# Altium PCB tPad_Yeongmi.PcbDoc (part 1 of 2)
Units mm, origin at the board's own origin, x right, y up, seen from the top; angles counter-clockwise.
Board outline 153.92 x 137.16 mm, 2 copper layers (Top Layer, Bottom Layer); 136 components, 117 nets, 499 pads, 114 vias.
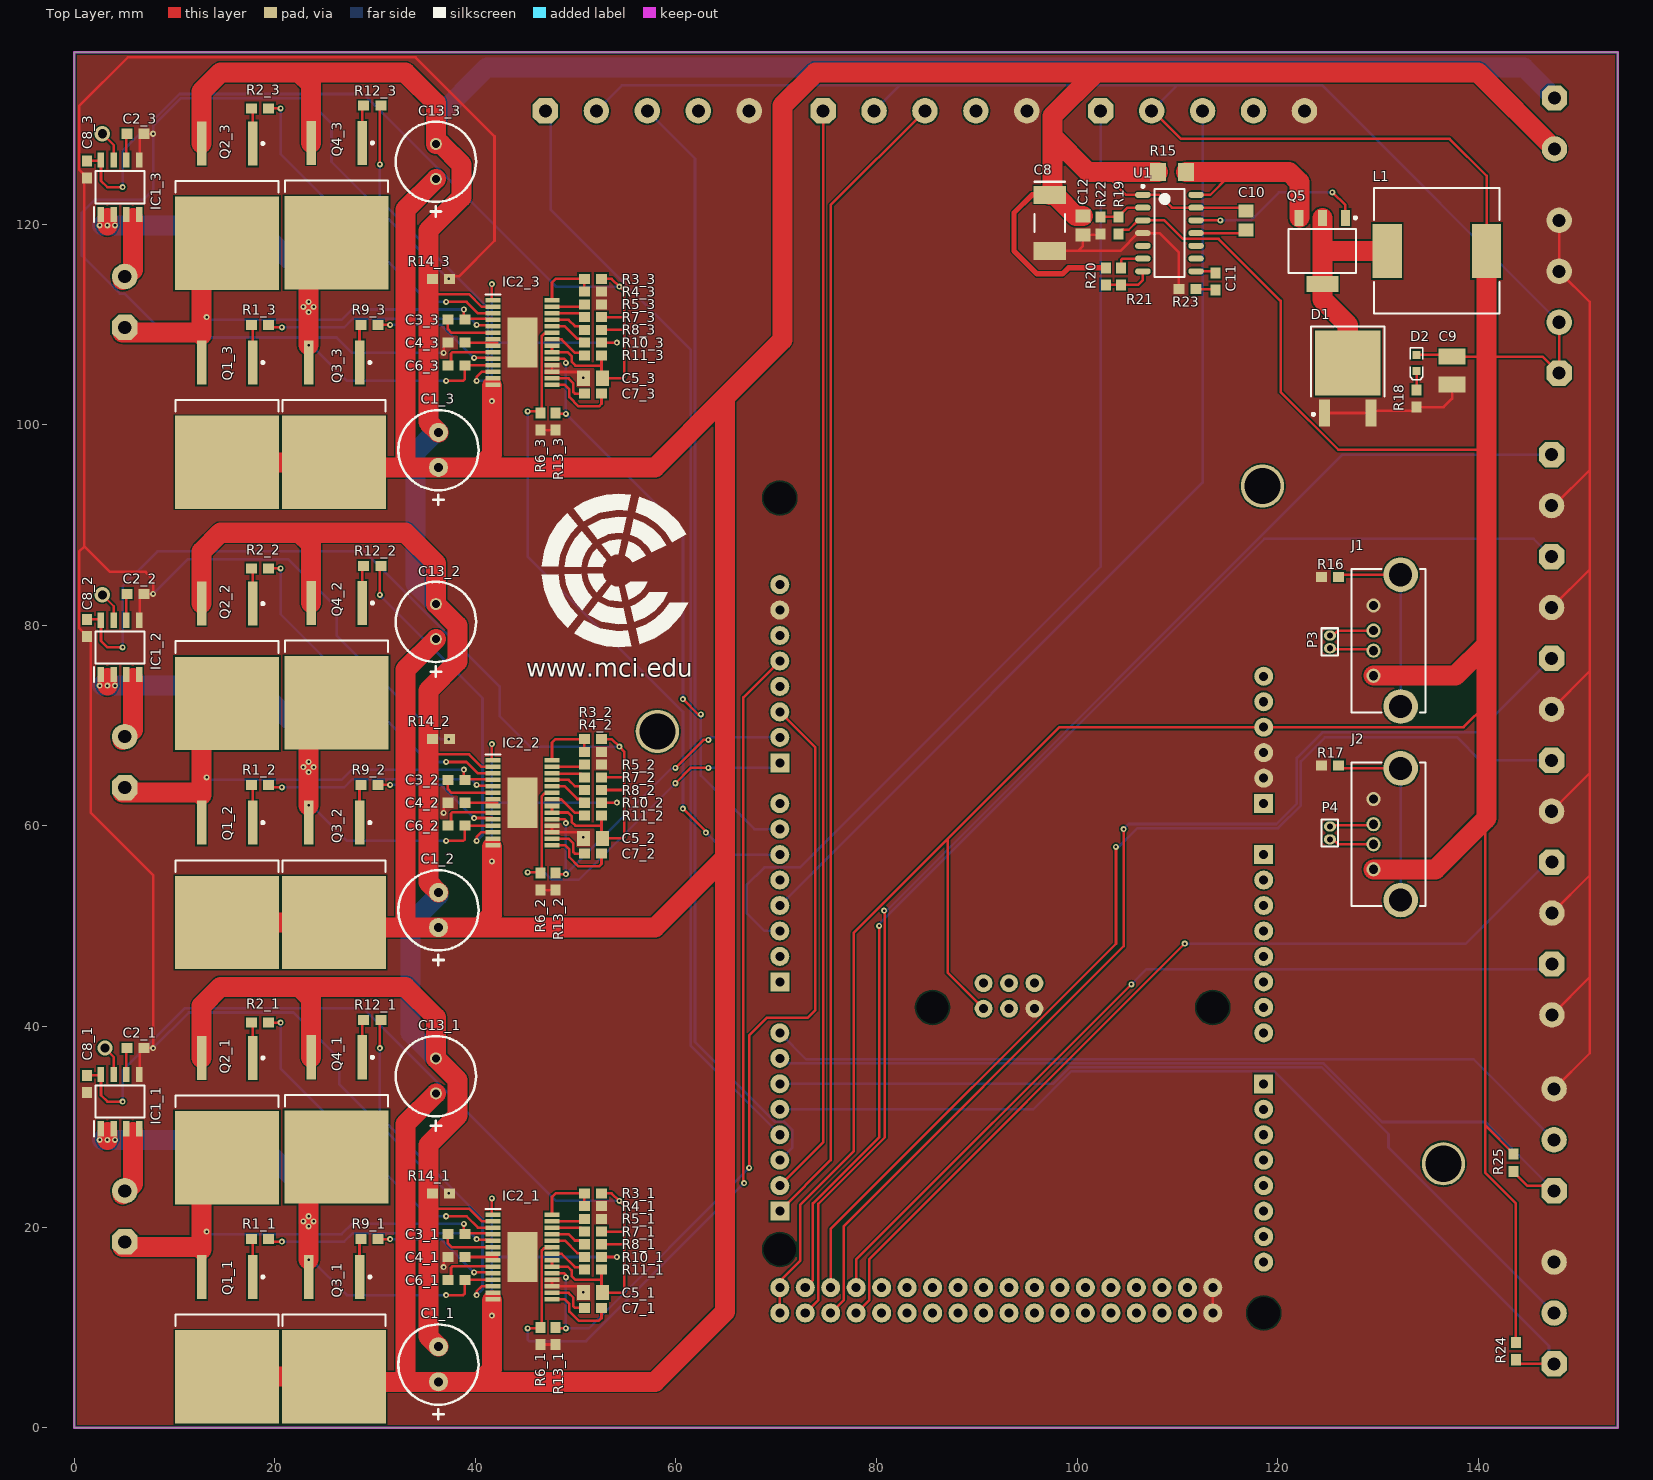
[diagram p0: Top Layer view]
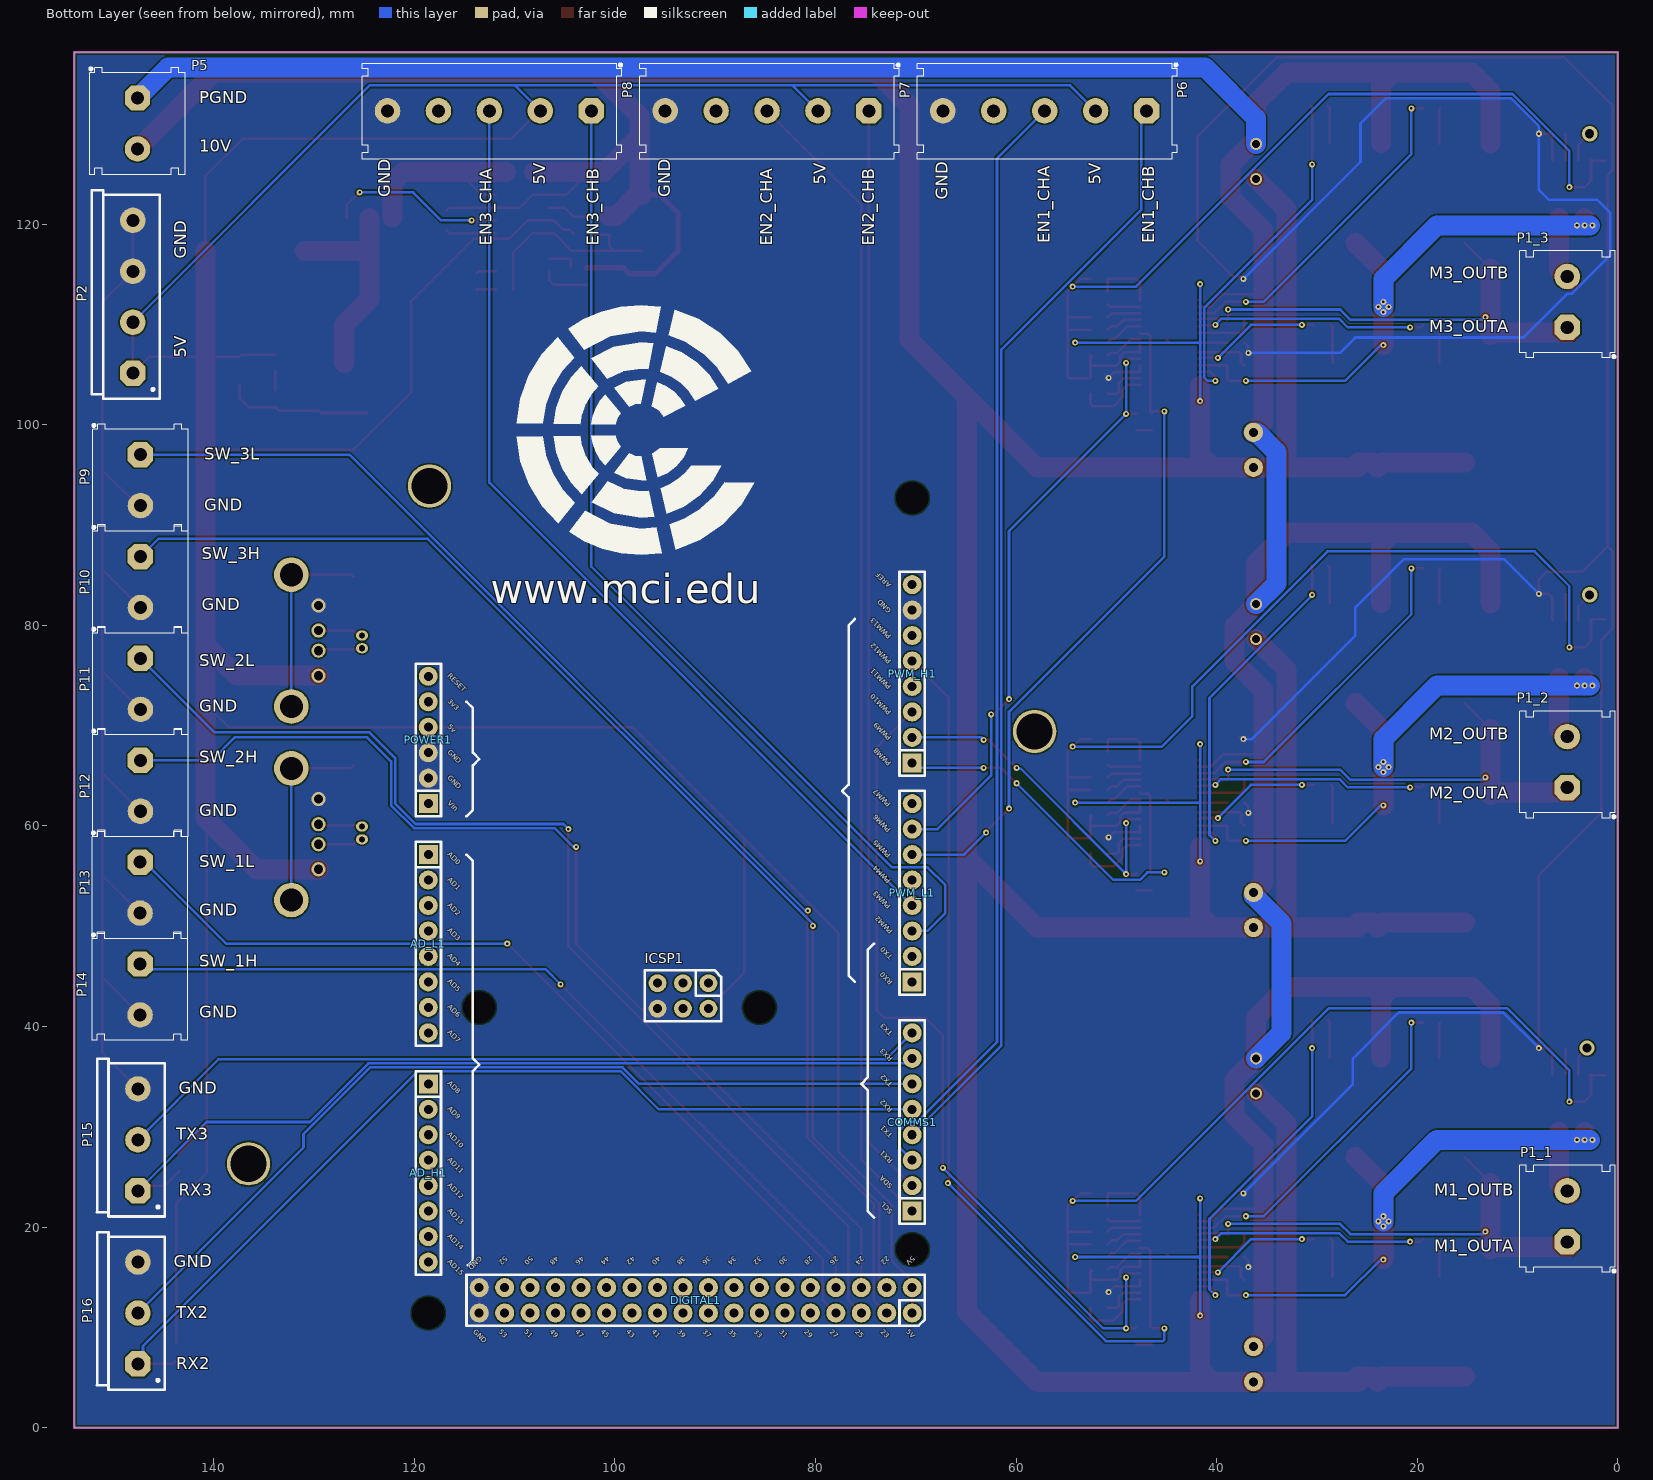
[diagram p1: Bottom Layer view, seen from below]
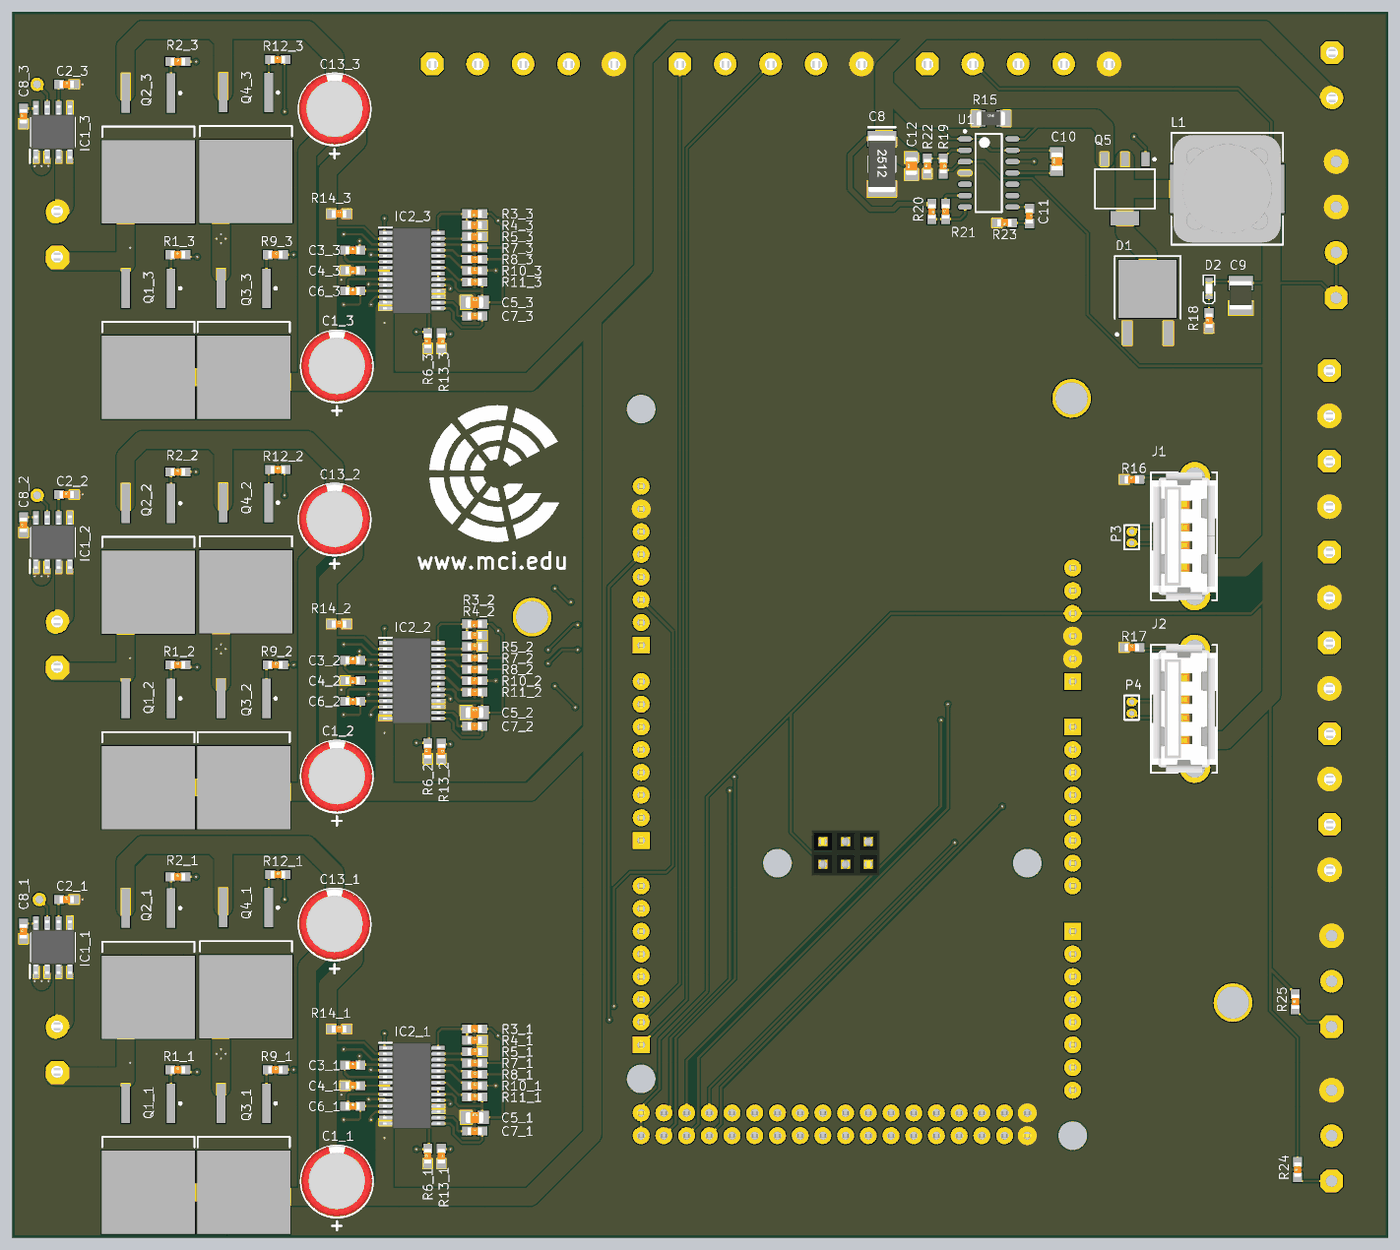
[diagram p3: 3D render of the assembled board from above, using the file's embedded part models]
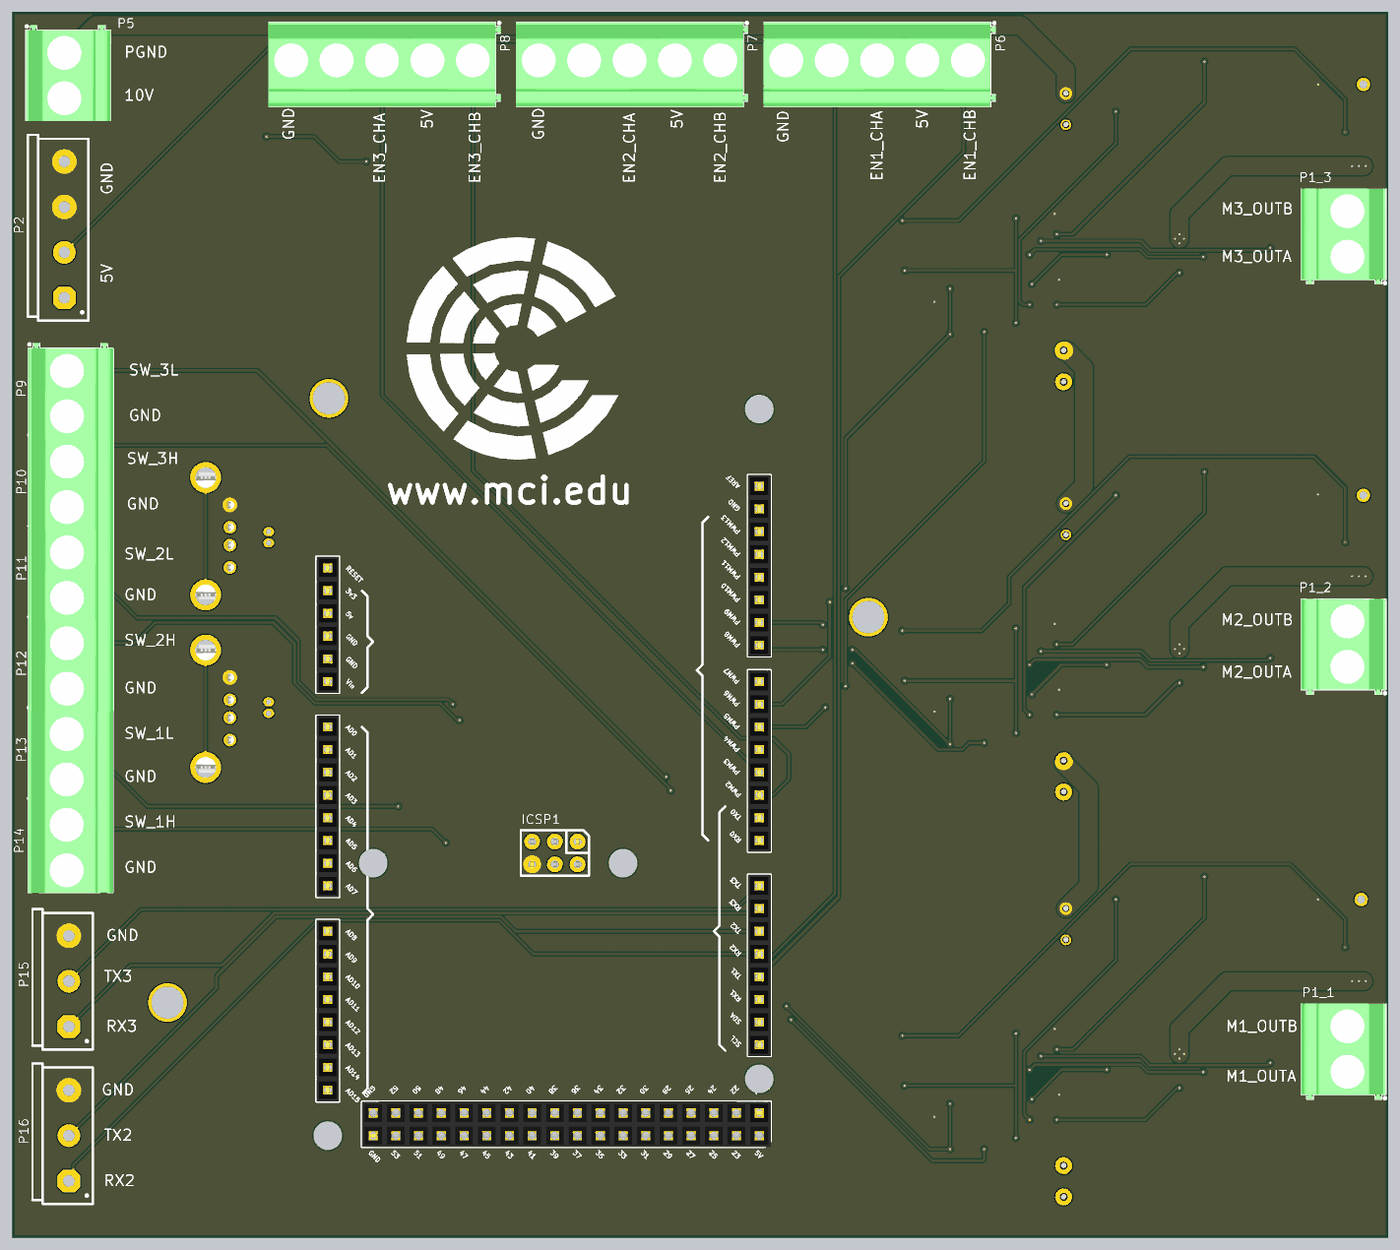
[diagram p4: 3D render of the assembled board from below, using the file's embedded part models]

## Layer stack, top to bottom
Top Solder: solder mask 0.0102, Solder Resist, Dk 3.5
Top Layer: signal copper 0.0356
Dielectric 1: dielectric 0.32, FR-4, Dk 4.8
Bottom Layer: signal copper 0.0356
Bottom Solder: solder mask 0.0102, Solder Resist, Dk 3.5

## Board outline
0,0 0,137.16 153.924,137.16 153.924,0

## Design rules (kind name [scope] priority, off if disabled: settings)
Clearance [All] p1: gap=0.152 ignorepadtopadclearanceinfootprint=FALSE
PolygonConnect [All] p1: connectstyle=Direct reliefconductorwidth=0.254 reliefentries=4 polygonreliefangle="90 Angle" airgapwidth=0.254
RoomDefinition Bridge_1 [InComponentClass('Bridge_1')] p1: confinementstyle=ConfineIn formatcopy=TRUE lockcomponents=FALSE outline -0.508,0 59.436,0 59.436,45.212 -0.508,45.212
RoomDefinition Bridge_2 [InComponentClass('Bridge_2')] p2: confinementstyle=ConfineIn formatcopy=TRUE lockcomponents=FALSE outline -0.508,45.3 59.436,45.3 59.436,91.186 -0.508,91.186
RoomDefinition Bridge_3 [InComponentClass('Bridge_3')] p3: confinementstyle=ConfineIn formatcopy=TRUE lockcomponents=FALSE outline -0.508,91.186 59.436,91.186 59.436,136.906 -0.508,136.906
RoomDefinition U_Arduino [InComponentClass('U_Arduino')] p4: confinementstyle=ConfineIn formatcopy=TRUE lockcomponents=FALSE outline 125.222,109.728 125.222,4.572 65.532,4.572 65.532,109.728
RoutingVias [All] p1: holewidth=0.25 width=0.6 viastyle="Through Hole" minholewidth=0.2 minwidth=0.25 maxholewidth=0.1 maxwidth=2
SolderMaskExpansion [All] p1: expansion=0.102
Width [All] p1: maxlimit=2 minlimit=0.254 preferedwidth=0.254
30 further rules are at their usual default settings.

## Classes and differential pairs
component class Overview: P6 P7 P8 P9 P10 P11 P12 P13 P14 P15 P16 R24 R25
component class U_Arduino: AD_H1 AD_L1 COMMS1 DIGITAL1 ICSP1 POWER1 PWM_H1 PWM_L1
channel class OutputStage: Bridge_1 Bridge_2 Bridge_3
component class PowerSupply: C8 C9 C10 C11 C12 D1 D2 J1 J2 L1 P2 P3 P4 P5 Q5 R15 R16 R17 R18 R19 R20 R21 R22 R23 U1
component class Bridge_1: C1_1 C2_1 C3_1 C4_1 C5_1 C6_1 C7_1 C8_1 C13_1 IC1_1 IC1_U_OutputStage3 IC2_1 IC2_U_OutputStage3 P1_1 Q1_1 Q1_U_OutputStage3 Q2_1 Q2_U_OutputStage3 Q3_1 Q3_U_OutputStage3 Q4_1 Q4_U_OutputStage3 R1_1 R2_1 R3_1 R4_1 R5_1 R6_1 R7_1 R8_1 R9_1 R10_1 R11_1 R12_1 R13_1 R14_1
component class Bridge_2: C1_2 C2_2 C3_2 C4_2 C5_2 C6_2 C7_2 C8_2 C13_2 IC1_2 IC1_U_OutputStage2 IC2_2 IC2_U_OutputStage2 P1_2 Q1_2 Q1_U_OutputStage2 Q2_2 Q2_U_OutputStage2 Q3_2 Q3_U_OutputStage2 Q4_2 Q4_U_OutputStage2 R1_2 R2_2 R3_2 R4_2 R5_2 R6_2 R7_2 R8_2 R9_2 R10_2 R11_2 R12_2 R13_2 R14_2
component class Bridge_3: C1_3 C2_3 C3_3 C4_3 C5_3 C6_3 C7_3 C8_3 C13_3 IC1_3 IC1_U_OutputStage1 IC2_3 IC2_U_OutputStage1 P1_3 q Q1_3 Q1_U_OutputStage1 Q2_3 Q2_U_OutputStage1 Q3_3 Q3_U_OutputStage1 Q4_3 Q4_U_OutputStage1 R1_3 R2_3 R3_3 R4_3 R5_3 R6_3 R7_3 R8_3 R9_3 R10_3 R11_3 R12_3 R13_3 R14_3

## Components (designator, comment, footprint, x,y, rotation, side; value= is the part's Value field where it differs from the comment)
AD_H1 "AD_H" "Header 8x1 8.5mm" 118.618,34.29 r270 bottom locked
AD_L1 "AD_L" "Header 8x1 8.5mm" 118.618,57.15 r270 bottom locked
C1_1 "100µF" Cap_THT_Elko_rad_D8mm#1 36.322,6.29 r90 top (schematic designator C1)
C1_2 "100µF" Cap_THT_Elko_rad_D8mm#1 36.322,51.59 r90 top (schematic designator C1)
C1_3 "100µF" Cap_THT_Elko_rad_D8mm#1 36.322,97.476 r90 top (schematic designator C1)
C2_1 "100nF" _0603 6.096,37.846 r0 top (schematic designator C2)
C2_2 "100nF" _0603 6.096,83.146 r0 top (schematic designator C2)
C2_3 "100nF" _0603 6.096,129.032 r0 top (schematic designator C2)
C3_1 "100nF" _0603 38.1,19.304 r0 top (schematic designator C3)
C3_2 "100nF" _0603 38.1,64.604 r0 top (schematic designator C3)
C3_3 "100nF" _0603 38.1,110.49 r0 top (schematic designator C3)
C4_1 "4,7µF" _0603 38.1,17.018 r180 top (schematic designator C4)
C4_2 "4,7µF" _0603 38.1,62.318 r180 top (schematic designator C4)
C4_3 "4,7µF" _0603 38.1,108.204 r180 top (schematic designator C4)
C5_1 "1µF" _0805 51.728,13.462 r0 top (schematic designator C5)
C5_2 "1µF" _0805 51.728,58.762 r0 top (schematic designator C5)
C5_3 "1µF" _0805 51.728,104.648 r0 top (schematic designator C5)
C6_1 "100nF" _0603 38.1,14.732 r0 top (schematic designator C6)
C6_2 "100nF" _0603 38.1,60.032 r0 top (schematic designator C6)
C6_3 "100nF" _0603 38.1,105.918 r0 top (schematic designator C6)
C7_1 "470nF" _0603 51.728,11.938 r0 top (schematic designator C7)
C7_2 "470nF" _0603 51.728,57.238 r0 top (schematic designator C7)
C7_3 "470nF" _0603 51.728,103.124 r0 top (schematic designator C7)
C8 "100µF/25V Tan" C 97.282,120.142 r270 top
C8_1 "100nF" _0603 1.27,34.29 r90 top (schematic designator C8)
C8_2 "100nF" _0603 1.27,79.756 r90 top (schematic designator C8)
C8_3 "100nF" _0603 1.27,125.476 r90 top (schematic designator C8)
C9 "100µF/16V" _1210 137.414,105.41 r90 top
C10 "220nF" _0805 116.84,120.396 r90 top
C11 "22nF" _0603 113.792,114.3 r270 top
C12 "220nF" _0805 100.584,119.888 r90 top
C13_1 "100µF" Cap_THT_Elko_rad_D8mm#2 36.068,35.048 r90 top (schematic designator C13)
C13_2 "100µF" Cap_THT_Elko_rad_D8mm#2 36.068,80.348 r90 top (schematic designator C13)
C13_3 "100µF" Cap_THT_Elko_rad_D8mm#2 36.068,126.234 r90 top (schematic designator C13)
COMMS1 "Communication" "Header 8x1 8.5mm" 70.358,21.59 r90 bottom locked
D1 "IDD03SG60C" TO_252 127,102.826 r90 top
D2 "blue" LED_0603 133.858,106.172 r270 top
DIGITAL1 "IO_36" "HEADER 36X 8MM" 70.358,11.43 r0 bottom locked
IC1_1 "ACS712ELCTR-20A-T" SOIC127P600X175-8N 4.572,32.512 r90 top (schematic designator IC1)
IC1_2 "ACS712ELCTR-20A-T" SOIC127P600X175-8N 4.572,77.812 r90 top (schematic designator IC1)
IC1_3 "ACS712ELCTR-20A-T" SOIC127P600X175-8N 4.572,123.698 r90 top (schematic designator IC1)
IC2_1 "A3941KLPTR" SOP65P640X120-29N 44.704,17.018 r0 top (schematic designator IC2)
IC2_2 "A3941KLPTR" SOP65P640X120-29N 44.704,62.318 r0 top (schematic designator IC2)
IC2_3 "A3941KLPTR" SOP65P640X120-29N 44.704,108.204 r0 top (schematic designator IC2)
ICSP1 "ICSP" ICSP 90.678,44.323 r270 bottom
J1 "614004185023" 614004185023 131.064,78.486 r90 top
J2 "614004185023" 614004185023 131.064,59.182 r90 top
L1 "IND_47u_3A8" WE_PD_XXL 135.89,117.348 r0 top
P1_1 "WRTBL_2P_508" WRTBL_2P_508 4.826,21.082 r90 bottom (schematic designator P1)
P1_2 "WRTBL_2P_508" WRTBL_2P_508 4.826,66.382 r90 bottom (schematic designator P1)
P1_3 "WRTBL_2P_508" WRTBL_2P_508 4.826,112.268 r90 bottom (schematic designator P1)
P2 "WRTBL_4P_508" WRTBL_4P_508 148.082,112.776 r90 bottom
P3 "Loetpad_2x_1_27" Loetpad_2x_1_27 125.222,78.994 r270 top
P4 "Loetpad_2x_1_27" Loetpad_2x_1_27 125.222,59.944 r270 top
P5 "WRTBL_2P_508" WRTBL_2P_508 147.828,130.048 r270 bottom
P6 "WRTBL_5P_508" WRTBL_5P_508 57.15,131.318 r0 bottom
P7 "WRTBL_5P_508" WRTBL_5P_508 84.836,131.318 r0 bottom
P8 "WRTBL_5P_508" WRTBL_5P_508 112.522,131.318 r0 bottom
P9 "WRTBL_2P_508" WRTBL_2P_508 147.532,94.479 r270 bottom
P10 "WRTBL_2P_508" WRTBL_2P_508 147.532,84.319 r270 bottom
P11 "WRTBL_2P_508" WRTBL_2P_508 147.532,74.159 r270 bottom
P12 "WRTBL_2P_508" WRTBL_2P_508 147.532,63.999 r270 bottom
P13 "WRTBL_2P_508" WRTBL_2P_508 147.574,53.848 r270 bottom
P14 "WRTBL_2P_508" WRTBL_2P_508 147.574,43.688 r270 bottom
P15 "WRTBL_3P_508" WRTBL_3P_508 147.574,28.702 r90 bottom
P16 "WRTBL_3P_508" WRTBL_3P_508 147.574,11.43 r90 bottom
POWER1 "POWER" "Header 6x1 8.5mm" 118.618,62.23 r90 bottom locked
PWM_H1 "PWM_H" "Header 8x1 8.5mm" 70.358,66.294 r90 bottom
PWM_L1 "PWM_L" "Header 8x1 8.5mm" 70.358,44.45 r90 bottom locked
Q1_1 "IPB034N06L3 G" INF-PG-TO-263-3-2_A_N 15.24,8.83 r270 top (schematic designator Q1)
Q1_2 "IPB034N06L3 G" INF-PG-TO-263-3-2_A_N 15.24,54.13 r270 top (schematic designator Q1)
Q1_3 "IPB034N06L3 G" INF-PG-TO-263-3-2_A_N 15.24,100.016 r270 top (schematic designator Q1)
Q2_1 "IPB034N06L3 G" INF-PG-TO-263-3-2_A_N 15.24,30.674 r270 top (schematic designator Q2)
Q2_2 "IPB034N06L3 G" INF-PG-TO-263-3-2_A_N 15.24,75.974 r270 top (schematic designator Q2)
Q2_3 "IPB034N06L3 G" INF-PG-TO-263-3-2_A_N 15.24,121.86 r270 top (schematic designator Q2)
Q3_1 "IPB034N06L3 G" INF-PG-TO-263-3-2_A_N 25.908,8.83 r270 top (schematic designator Q3)
Q3_2 "IPB034N06L3 G" INF-PG-TO-263-3-2_A_N 25.908,54.13 r270 top (schematic designator Q3)
Q3_3 "IPB034N06L3 G" INF-PG-TO-263-3-2_A_N 25.908,100.016 r270 top (schematic designator Q3)
Q4_1 "IPB034N06L3 G" INF-PG-TO-263-3-2_A_N 26.162,30.734 r270 top (schematic designator Q4)
Q4_2 "IPB034N06L3 G" INF-PG-TO-263-3-2_A_N 26.162,76.034 r270 top (schematic designator Q4)
Q4_3 "IPB034N06L3 G" INF-PG-TO-263-3-2_A_N 26.162,121.92 r270 top (schematic designator Q4)
Q5 "BSP613P" INF-PG-SOT223_SC-73_N 124.46,117.348 r270 top
R1_1 "47R5" _0603 18.542,18.796 r0 top (schematic designator R1)
R1_2 "47R5" _0603 18.542,64.096 r0 top (schematic designator R1)
R1_3 "47R5" _0603 18.542,109.982 r0 top (schematic designator R1)
R2_1 "47R5" _0603 18.542,40.386 r0 top (schematic designator R2)
R2_2 "47R5" _0603 18.542,85.686 r0 top (schematic designator R2)
R2_3 "47R5" _0603 18.542,131.572 r0 top (schematic designator R2)
R3_1 "47k" _0603 51.728,23.368 r180 top (schematic designator R3)
R3_2 "47k" _0603 51.728,68.668 r180 top (schematic designator R3)
R3_3 "47k" _0603 51.728,114.554 r180 top (schematic designator R3)
R4_1 "4k7" _0603 51.728,22.098 r0 top (schematic designator R4)
R4_2 "4k7" _0603 51.728,67.398 r0 top (schematic designator R4)
R4_3 "4k7" _0603 51.728,113.284 r0 top (schematic designator R4)
R5_1 "47k" _0603 51.728,20.828 r0 top (schematic designator R5)
R5_2 "47k" _0603 51.728,66.128 r0 top (schematic designator R5)
R5_3 "47k" _0603 51.728,112.014 r0 top (schematic designator R5)
R6_1 "47k" _0603 46.482,9.144 r90 top (schematic designator R6)
R6_2 "47k" _0603 46.482,54.444 r90 top (schematic designator R6)
R6_3 "47k" _0603 46.482,100.33 r90 top (schematic designator R6)
R7_1 "47k" _0603 51.728,19.558 r0 top (schematic designator R7)
R7_2 "47k" _0603 51.728,64.858 r0 top (schematic designator R7)
R7_3 "47k" _0603 51.728,110.744 r0 top (schematic designator R7)
R8_1 "47k" _0603 51.728,18.288 r0 top (schematic designator R8)
R8_2 "47k" _0603 51.728,63.588 r0 top (schematic designator R8)
R8_3 "47k" _0603 51.728,109.474 r0 top (schematic designator R8)
R9_1 "47R5" _0603 29.464,18.796 r0 top (schematic designator R9)
R9_2 "47R5" _0603 29.464,64.096 r0 top (schematic designator R9)
R9_3 "47R5" _0603 29.464,109.982 r0 top (schematic designator R9)
R10_1 "20k" _0603 51.728,17.018 r0 top (schematic designator R10)
R10_2 "20k" _0603 51.728,62.318 r0 top (schematic designator R10)
R10_3 "20k" _0603 51.728,108.204 r0 top (schematic designator R10)
R11_1 "47k" _0603 51.728,15.748 r0 top (schematic designator R11)
R11_2 "47k" _0603 51.728,61.048 r0 top (schematic designator R11)
R11_3 "47k" _0603 51.728,106.934 r0 top (schematic designator R11)
R12_1 "47R5" _0603 29.718,40.64 r0 top (schematic designator R12)
R12_2 "47R5" _0603 29.718,85.94 r0 top (schematic designator R12)
R12_3 "47R5" _0603 29.718,131.826 r0 top (schematic designator R12)
R13_1 "47k" _0603 48.006,9.144 r270 top (schematic designator R13)
R13_2 "47k" _0603 48.006,54.444 r270 top (schematic designator R13)
R13_3 "47k" _0603 48.006,100.33 r270 top (schematic designator R13)
R14_1 "0R" _0603 36.576,23.368 r0 top (schematic designator R14)
R14_2 "0R" _0603 36.576,68.668 r0 top (schematic designator R14)
R14_3 "0R" _0603 36.576,114.554 r0 top (schematic designator R14)
R15 "0,047R" _1206 109.474,125.222 r0 top
R16 "1M" _0603 125.222,84.836 r0 top
R17 "1M" _0603 125.222,66.04 r0 top
R18 "680R" _0603 133.858,102.616 r90 top
R19 "110k" _0603 104.14,119.888 r270 top
R20 "390k" _0603 102.87,114.808 r270 top
R21 "68k" _0603 104.394,114.808 r90 top
R22 "68k" _0603 102.362,119.888 r90 top
R23 "430R" _0603 110.998,113.538 r180 top
R24 "1k2" _0603 143.764,7.62 r90 top
R25 "1k2" _0603 143.51,26.416 r90 top
U1 "IFX80471SK V" INF-PG-DSO-14-1_N 109.22,119.126 r0 top

## Footprints (in the part's own frame and the unit in brackets; to place one, negate y for a bottom-side part, rotate by r counter-clockwise, add the part's x,y. Pads: shape width x height; smd on the part's side, far side on the other; paste and mask are expansions set on the pad)
614004185023 [mm] "USB 2.0 Type A Vertical Short Type THT"
  round 1.42 hole 0.92: 1(-3.5,1.5) 2(-1,1.5) 3(1,1.5) 4(3.5,1.5)
  round 3.45 hole 2.3: Shell(-6.57,-1.21) Shell(6.57,-1.21)
  silkscreen extent -7.15,-3.7 7.15,3.7, body extent -7.15,-3.7 7.15,3.7, height 10.03
_0603 [mm]
  rect 1.1x1 smd: 1(-0.85,0) 2(0.85,0)
  body extent -0.8,-0.41 0.8,0.39, height 0.3
_0805 [mm]
  rect 1.3x1.5 smd: 1(-0.95,0) 2(0.95,0)
  body extent -1,-0.64 1,0.62, height 0.78
_1206 [mm]
  rect 1.6x1.8 smd: 1(-1.4,0) 2(1.4,0)
  body extent -1.6,-0.81 1.6,0.79, height 1
_1210 [mm]
  rect 1.6x2.7 smd: 1(-1.4,0) 2(1.4,0)
  body extent -1.57,-1.24 1.63,1.26, height 1.5
C [mm]
  rect 1.8x3.2 smd: 1(-2.8,0) 2(2.8,0)
  silkscreen extent -4.1,-1.5 0.9,1.5, body extent -3.18,-1.5 3.18,1.5, height 1.6
Cap_THT_Elko_rad_D8mm#1 [mm]
  round 1.9 hole 0.9: 1(-1.718,0) 2(1.782,0)
  silkscreen extent -5.46,-4 4,4, body extent -3.94,-4 4.06,4, height 11.74
Cap_THT_Elko_rad_D8mm#2 [mm]
  round 1.2 hole 0.8: 1(-1.718,0) 2(1.782,0)
  silkscreen extent -5.46,-4 4,4, body extent -3.94,-4 4.06,4, height 11.74
"Header 6x1 8.5mm" [mm]
  rect 1.9x1.9 hole 0.9: 1(0,0)
  round 1.9 hole 0.9: 2(2.54,0) 3(5.08,0) 4(7.62,0) 5(10.16,0) 6(12.7,0)
  silkscreen extent -1.27,-1.27 13.97,1.27, body extent -1.27,-1.27 13.97,1.27, height 8.5
"Header 8x1 8.5mm" [mm]
  rect 1.9x1.9 hole 0.9: 1(0,0)
  round 1.9 hole 0.9: 2(2.54,0) 3(5.08,0) 4(7.62,0) 5(10.16,0) 6(12.7,0) 7(15.24,0) 8(17.78,0)
  silkscreen extent -1.27,-1.27 19.05,1.27, body extent -1.27,-1.27 19.05,1.27, height 8.5
"HEADER 36X 8MM" [mm]
  round 1.9 hole 0.9: 1(0,0) 2(0,-2.54) 3(2.54,0) 4(2.54,-2.54) 5(5.08,0) 6(5.08,-2.54) 7(7.62,0) 8(7.62,-2.54) 9(10.16,0) 10(10.16,-2.54) 11(12.7,0) 12(12.7,-2.54) 13(15.24,0) 14(15.24,-2.54) 15(17.78,0) 16(17.78,-2.54) 17(20.32,0) 18(20.32,-2.54) 19(22.86,-2.54) 20(22.86,0) 21(25.4,0) 22(25.4,-2.54) 23(27.94,0) 24(27.94,-2.54) 25(30.48,0) 26(30.48,-2.54) 27(33.02,0) 28(33.02,-2.54) 29(35.56,0) 30(35.56,-2.54) 31(38.1,0) 32(38.1,-2.54) 33(40.64,0) 34(40.64,-2.54) 35(43.18,0) 36(43.18,-2.54)
  silkscreen extent -1.27,-3.81 44.45,1.27, body extent -1.27,-3.81 44.45,1.27, height 8.5
ICSP [mil]
  round 70 hole 35.43: 1(0,0) 2(100,0) 3(0,-100) 4(100,-100) 5(0,-200) 6(100,-200)
  silkscreen extent -50,-250 150,50, body extent -50,-250 150,50, height 485
INF-PG-DSO-14-1_N [mm] "SOP, 14-Leads, Body 8.65x3.9mm, Pitch 1.27mm, IPC Medium Density"
  oval 1.55x0.6 smd: 1(-2.65,3.81) 2(-2.65,2.54) 3(-2.65,1.27) 4(-2.65,0) 5(-2.65,-1.27) 6(-2.65,-2.54) 7(-2.65,-3.81) 8(2.65,-3.81) 9(2.65,-2.54) 10(2.65,-1.27) 11(2.65,0) 12(2.65,1.27) 13(2.65,2.54) 14(2.65,3.81)
  silkscreen extent -2.77,-4.38 1.48,4.78, body extent -2,-4.38 2,4.38, height 1.75
INF-PG-SOT223_SC-73_N [mm] "SOT223, 4-Leads, Body 6.5x3.5mm, Pitch 2.3mm, IPC Medium Density"
  rect 1.6x0.9 smd: 1(-3.3,2.3) 2(-3.3,0) 3(-3.3,-2.3)
  rect 1.6x3.2 smd: 4(3.3,0)
  silkscreen extent -3.42,-3.35 2.2,3.43, body extent -1.85,-3.35 1.85,3.35, height 1.8
INF-PG-TO-263-3-2_A_N [mm]
  rect 4.4x0.95 smd: 1(-6.2,2.54) 3(-6.2,-2.54)
  rect 9.3x10.4 smd: 2(3.75,0)
  silkscreen extent -6.32,-5.15 -1.3,5.15, body extent -2.45,-5.15 7,5.15, height 4.57
LED_0603 [mm] "Chip LED, 2-Leads, Body 1.6x0.8mm, IPC Medium Density"
  rect 0.8x0.8 smd: 1(-0.8,0) 2(0.8,0)
  silkscreen extent -1.52,-0.64 1.65,0.64, body extent -0.8,-0.4 0.8,0.4, height 0.7
Loetpad_2x_1_27 [mm] "Connector; Header; 2 Position"
  oval 1x1.2 hole 0.6: 1(0,0) 2(1.27,0)
  silkscreen extent -0.72,-0.83 2,0.82
SOIC127P600X175-8N [mm]
  rect 1.525x0.65 smd: 1(-2.712,1.905) 2(-2.712,0.635) 3(-2.712,-0.635) 4(-2.712,-1.905) 5(2.712,-1.905) 6(2.712,-0.635) 7(2.712,0.635) 8(2.712,1.905)
  silkscreen extent -3.47,-2.45 1.6,2.58, body extent -3,-2.45 3,2.45, height 1.75
SOP65P640X120-29N [mm]
  rect 1.475x0.45 smd: 1(-2.938,4.225) 2(-2.938,3.575) 3(-2.938,2.925) 4(-2.938,2.275) 5(-2.938,1.625) 6(-2.938,0.975) 7(-2.938,0.325) 8(-2.938,-0.325) 9(-2.938,-0.975) 10(-2.938,-1.625) 11(-2.938,-2.275) 12(-2.938,-2.925) 13(-2.938,-3.575) 14(-2.938,-4.225) 15(2.938,-4.225) 16(2.938,-3.575) 17(2.938,-2.925) 18(2.938,-2.275) 19(2.938,-1.625) 20(2.938,-0.975) 21(2.938,-0.325) 22(2.938,0.325) 23(2.938,0.975) 24(2.938,1.625) 25(2.938,2.275) 26(2.938,2.925) 27(2.938,3.575) 28(2.938,4.225)
  rect 3x5 smd: 29(0,0)
  silkscreen extent -3.67,4.8 -2.2,4.8, body extent -3.2,-4.85 3.2,4.85, height 1.2
TO_252 [mm]
  rect 2.7x1.1 smd: 1(-1.643,2.3) 2(-1.643,-2.3)
  rect 6.5x6.5 smd: 3(3.346,0)
  silkscreen extent -1.9,-3.68 6.98,3.68, body extent 0,-3.43 6.73,3.43, height 2.3
WE_PD_XXL [mm] "SMD Inductor, 2-Leads, Body 12,0x12,0mm"
  rect 2.9x5.4 smd: 1(-4.95,0) 2(4.95,0)
  silkscreen extent -6.25,-6.25 6.25,6.25, body extent -6,-6 6,6, height 10.36
WRTBL_2P_508 [mm]
  oct 2.54x2.54 hole 1.3: 1(-2.549,0.212)
  round 2.54 hole 1.3: 2(2.531,0.212)
  silkscreen extent -5.59,-4.57 5.08,4.95, body extent -5.62,-4.55 5.11,4.95, height 15
WRTBL_3P_508 [mm]
  oct 2.54x2.54 hole 1.3: 1(-5.08,0)
  round 2.54 hole 1.3: 2(0,0) 3(5.08,0)
  silkscreen extent -7.65,-2.68 8.07,4.08, body extent -7.57,-2.6 8,4.08, height 13.97
WRTBL_4P_508 [mm]
  oct 2.54x2.54 hole 1.3: 1(-7.62,0)
  round 2.54 hole 1.3: 2(-2.54,0) 3(2.54,0) 4(7.62,0)
  silkscreen extent -10.19,-2.68 10.6,4.08, body extent -9.9,-2.62 10.3,4.06, height 13.97
WRTBL_5P_508 [mm]
  oct 2.54x2.54 hole 1.3: 1(-10.16,0)
  round 2.54 hole 1.3: 2(-5.08,0) 3(0,0) 4(5.08,0) 5(10.16,0)
  silkscreen extent -13.21,-4.7 12.7,4.83, body extent -13.24,-4.7 12.73,4.8, height 15.05

## Part data
AD_H1 PWM_L1: Supplier Part Number 1=2698940, Supplier 1=Arrow, Supplier 2=Arrow, Supplier 3=Digi-Key, Supplier 4=Arrow, Supplier Part Number 2=2698939, Supplier Part Number 3=SAM1198-08-ND, Supplier Part Number 4=2698925
AD_L1 COMMS1 PWM_H1: Supplier Part Number 1=SAM1198-08-ND, Supplier 1=Digi-Key, Supplier 2=Arrow, Supplier 3=Arrow, Supplier 4=Arrow
  AD_L1: Supplier 5=Arrow, Supplier Part Number 2=2698939, Supplier Part Number 3=2698940, Supplier Part Number 4=43085273, Supplier Part Number 5=2698925
  COMMS1 PWM_H1: Supplier Part Number 2=2698940, Supplier Part Number 3=2698939, Supplier Part Number 4=2698925
C1_1 C1_2 C1_3 C13_1 C13_2 C13_3: library part Cap_15, Capacity=100u, Voltage=35V, ax_rad=rad, ComponentLink1URL=http://de.rs-online.com/web/search/searchBrowseAction.html?method=getProduct&R=2286767, mounting=THT, Name=Cap_Elko_rad_100u_35V, Name_Hyperlink="Elko 100µF 35VDC", QR=1, RS_number=228-6767, UID=Cap_15
C2_1 C2_2 C2_3 C3_1 C3_2 C3_3 C4_1 C4_2 C4_3 C6_1 C6_2 C6_3 C7_1 C7_2 C7_3 C8_1 C8_2 C8_3 C11: library part Cap_129, mounting=SMD, Name=Cap_0603, QR=0, UID=Cap_129
C5_1 C5_2 C5_3: library part Cap_128, ComponentLink1URL=#VALUE!, mounting=SMD, Name=Cap_0805, QR=0, UID=Cap_128
C8: library part Cap_56, Capacity=47u, Voltage=25v, mounting=SMD, Name=Cap_tan_47u_25V, Name_Hyperlink="Capacitor Tantalum SMT TR3D 25V 47uF", QR=1, RS_number=684-5284P, UID=Cap_56
C9: library part Cap_65, Capacity=?F, Voltage=?V, mounting=SMD, Name=Cap_1210, UID=Cap_65
C10 C12: library part Cap_63, Capacity=?F, Voltage=?V, mounting=SMD, Name=Cap_0805, UID=Cap_63
D1: library part DIODE_12, Current / Power="3.5 A", mounting=SMD, Name=30WQ06FN, Name_Hyperlink="Diode 30WQ06FN", QR=0, RS_number=300-357P, Type=Schottky, UID=DIODE_12
D2: library part DIODE_60, Colour=blau, mounting=SMD, Name=LED_0603_blau, Name_Hyperlink=http://at.rs-online.com/web/p/products/6973610P/, QR=0, RS_number=697-3610P, Type=LED, UID=DIODE_60
DIGITAL1: Supplier Part Number 1=SAM1196-18-ND, Supplier 1=Digi-Key, Supplier 2=Arrow, Supplier 3=Arrow, Supplier 4=Arrow, Supplier 5=Arrow, Supplier Part Number 2=48117090, Supplier Part Number 3=46093326, Supplier Part Number 4=2698278, Supplier Part Number 5=2698268
IC1_1 IC1_2 IC1_3: "Integrated Circuit", Manufacturer_Name="Allegro Microsystems", RS Part Number=6807135P, Allied_Number=R1076682, Datasheet Link=http://uk.rs-online.com/web/p/products/6807135P, Height=1.75mm, Manufacturer_Part_Number=ACS712ELCTR-20A-T, RS Price/Stock=http://uk.rs-online.com/web/p/products/6807135P
IC2_1 IC2_2 IC2_3: "Integrated Circuit", Manufacturer_Name="Allegro Microsystems", RS Part Number=7248704P, Datasheet Link=http://uk.rs-online.com/web/p/products/7248704, Height=1.2mm, Manufacturer_Part_Number=A3941KLPTR, RS Price/Stock=http://uk.rs-online.com/web/p/products/7248704P
ICSP1: Supplier Part Number 1=SAM1185-06-ND, Supplier 1=Digi-Key, Supplier 2=Arrow, Supplier 3=Arrow, Supplier 4=Arrow, Supplier 5=Digi-Key, Supplier Part Number 2=2699117, Supplier Part Number 3=43862781, Supplier Part Number 4=2699091, Supplier Part Number 5=SAM1196-06-ND
J1 J2: "USB 2.0 Type A Receptacle WR-COM, Vertical, THT, Short Type", Contact Resistance="30 mOhm", Operating Temperature="-55 to 85 degC", Rated Current="1.5 A", Working Voltage="30 VAC", ComponentLink1Description=Manufacturer, ComponentLink1URL=http://www.we-online.de, ComponentLink2Description=Datasheet, ComponentLink2URL=https://katalog.we-online.de/em/datasheet/614004185023.pdf, Connector Type="USB 2.0 Type A", Gender=Receptacle, Mounting Technology=THT, Orientation=Vertical, Packaging=Tray, Part Number=614004185023, Published Date="September 2018", Publisher="Wurth Elektronik"
L1: library part Ind_8, "Inductor", Current="3.8 A", Inductivity="47 uH", mounting=SMD, Name=IND_47u_3A8, QR=0, UID=Ind_8, Wuerth_number="744 7709 470"
P1_1 P1_2 P1_3 P5 P9 P10 P11 P12 P13 P14: library part Con_7, ComponentLink1URL=http://at.rs-online.com/web/search/searchBrowseAction.html?method=getProduct&R=1930586, mounting=THT, Name=WRTBL_2P_508, Name_Hyperlink="Printklemme 5,08mm 2-polig", Pins=2, QR=0, RS_number=193-0586, UID=Con_7
P2: library part Con_9, mounting=THT, Name=WRTBL_4P_508, Pins=4, QR=0, UID=Con_9
P3 P4: library part Con_77, mounting=THT, Name=Loetpad_2x_1_27, UID=Con_77
P6 P7 P8: library part Con_10, mounting=THT, Name=WRTBL_5P_508, Pins=5, QR=0, UID=Con_10
P15 P16: library part Con_8, mounting=THT, Name=WRTBL_3P_508, Pins=3, QR=0, UID=Con_8
POWER1: Supplier Part Number 1=52553843, Supplier 1=Arrow, Supplier 2=Arrow, Supplier 3=Digi-Key, Supplier 4=Arrow, Supplier 5=Arrow, Supplier Part Number 2=2699075, Supplier Part Number 3=SAM1198-06-ND, Supplier Part Number 4=2699089, Supplier Part Number 5=2699088
Q1_1 Q1_2 Q1_3 Q2_1 Q2_2 Q2_3 Q3_1 Q3_2 Q3_3 Q4_1 Q4_2 Q4_3: "N-Channel OptiMOS 3 Power-Transistor, 60 V VDS, 90 A ID, -55 to 175 degC, PG-TO-263-3-2, Reel, Green", Manufacturer=Infineon, Supplier Part Number 1="IPB034N06L3 GTR-ND", ComponentLink1Description="Manufacturer URL", ComponentLink1URL=http://www.infineon.com/, ComponentLink2Description=Datasheet, ComponentLink2URL=http://www.infineon.com/dgdl/IPP037N06L3_Rev2.7.pdf?folderId=db3a304313b8b5a60113cee8763b02d7&fileId=db3a30431b3e89eb011b4561341f7d38, ComponentLink3Description="Package Specification", ComponentLink3URL=http://www.infineon.com/dgdl/IPB026N06N_Rev2.2.pdf?folderId=db3a304313b8b5a60113cee8763b02d7&fileId=db3a3043372d5cc8013754c7b2a74f7c, DatasheetVersion="Rev. 2.7", Green=TRUE, Halogen-free=TRUE, ID (max)="90 A", IDpuls (max)="360 A", Mounting Technology="Surface Mount", PackageDescription="3-Pin Plastic (Green) Transistor Single Outline Package, 10.06 x 8.98 mm Body, 2.54 mm Pitch", PackageReference=PG-TO-263-3-2, PackageVersion="Rev. 01, 08/2007", Packing=Reel, PartNumber="IPB034N06L3 G", Polarity=N, Ptot (max)="167 W", QG="59 nC", RDS (on) (max)="3.7 mOhm", RDS (on) (max) (@4.5V)="5.7 mOhm", Rth="0.9 K/W", RthJA (max)="62 K/W", RthJC (max)="0.9 K/W", Supplier 1=Digi-Key, Supplier 2=Digi-Key, Supplier 3=Digi-Key, Supplier 4=Mouser, Supplier Part Number 2="IPB034N06L3 GCT-ND", Supplier Part Number 3="IPB034N06L3 GDKR-ND", Supplier Part Number 4=726-IPB034N06L3G, VDS (max)="60 V", VGS(th) (max)="2.2 V", VGS(th) (min)="1.2 V"
Q5: library part Tran_33, "P-Channel SIPMOS Small-Signal-Transistor, -60 V VDS, -2.9 A ID, -55 to 150 degC, PG-SOT223 (SC-73), Reel, Green", Manufacturer=Infineon, Supplier Part Number 1=BSP613P-ND, ComponentLink1Description="Manufacturer URL", ComponentLink1URL=http://www.infineon.com/, ComponentLink2Description=Datasheet, ComponentLink2URL=http://www.infineon.com/dgdl/BSP613P_Rev2.7.pdf?folderId=db3a304314dca38901154a72e3951a65&fileId=db3a30433b47825b013b60ac86a96dc0, ComponentLink3Description="Package Specification", ComponentLink3URL=http://www.infineon.com/dgdl/SOT223-Package_Overview.pdf?folderId=db3a30431936bc4b0119530470b03c3d&fileId=db3a30431936bc4b0119531d40b93c5c, DatasheetVersion="Rev. 2.7", Green=TRUE, Halogen-free=TRUE, ID (max)="-2.9 A", IDpuls (max)="-11.6 A", Mode=Enhancement, mounting=SMD, Mounting Technology="Surface Mount", Name=BSP613P, PackageDescription="4-Pin Small Outline Transistor Package, 6.5 x 3.5 mm Body, 2.3 mm Pitch", PackageReference="PG-SOT223 (SC-73)", PackageVersion=Apr-08, Packing=Reel, PartNumber=BSP613P, Polarity=P, Pto t (max)="1.8 W", QG="-22 nC", RDS (on) (max)="130 mOhm", Rth="100 K/W", Supplier 1=Digi-Key, Technology=SIPMOS, Type=P, UID=Tran_33, VDS (max)="-60 V", VGS(th) (max)="-4 V", VGS(th) (min)="-2.1 V"
R1_1 R1_2 R1_3 R2_1 R2_2 R2_3 R3_1 R3_2 R3_3 R4_1 R4_2 R4_3 R5_1 R5_2 R5_3 R6_1 R6_2 R6_3 R7_1 R7_2 R7_3 R8_1 R8_2 R8_3 R9_1 R9_2 R9_3 R10_1 R10_2 R10_3 R11_1 R11_2 R11_3 R12_1 R12_2 R12_3 R13_1 R13_2 R13_3 R14_1 R14_2 R14_3 R16 R17 R18 R19 R20 R21 R22 R23 R24 R25: library part Res_5, mounting=SMD, Name=Res_0603, UID=Res_5
  R24 R25: ComponentLink1URL=#VALUE!
R15: library part Res_7, mounting=SMD, Name=Res_1206, UID=Res_7
U1: "Step-Down DC/DC Controller, 2,300 mA Iq, -40 to 125 degC, PG-DSO-14-1, Reel, Green", Manufacturer=Infineon, Max Peak Reflow Temp="260 degC", Supplier Part Number 1="IFX80471SK VINTR-ND", Tolerance=3(5)%, ComponentLink1Description="Manufacturer URL", ComponentLink1URL=http://www.infineon.com/, ComponentLink2Description=Datasheet, ComponentLink2URL=http://www.infineon.com/dgdl/DCDC-Controller-IFX80471-Data-Sheet-V10-Infineon.pdf?folderId=db3a304314dca3890115039cf70d0bf0&fileId=db3a30432e398416012e487ec6e42599, ComponentLink3Description="Package Specification", ComponentLink3URL=http://www.infineon.com/dgdl/DCDC-Controller-IFX80471-Data-Sheet-V10-Infineon.pdf?folderId=db3a304314dca3890115039cf70d0bf0&fileId=db3a30432e398416012e487ec6e42599, DatasheetVersion="Rev. 1.0", Green=TRUE, Halogen-free=TRUE, Inhibit=TRUE, IQ (max)="2,300 mA", Iq (typ)="130 uA", Max Number Reflow=3, Mounting Technology="Surface Mount", MSL=3, Output="Buck Converter", PackageDescription="14-Pin Plastic (Green) Dual Small Outline Package, 8.65 x 3.9 mm Body, 1.27 mm Pitch", PackageReference=PG-DSO-14-1, PackageVersion=Apr-11, Packing=Reel, PartNumber="IFX80471SK V", Protect=TRUE, Reset=TRUE, Supplier 1=Digi-Key, Supplier 2=Digi-Key, Supplier 3=Digi-Key, Supplier 4=Mouser, Supplier Part Number 2="IFX80471SK VINCT-ND", Supplier Part Number 3="IFX80471SK VINDKR-ND", Supplier Part Number 4=726-IFX80471SKV, VQ (max)=adjustable

## Free pads (board coordinates)
  round 1.6 hole 3.2: 0(70.358,17.78) 0(70.358,92.71) 0(85.598,41.91) 0(113.538,41.91) 0(118.618,11.43)
  round 4.318 hole 3.599: 6(118.491,93.904) 8(58.153,69.431) 8(136.538,26.314)

## Via types
v1: diameter 0.6, hole 0.25, Top Layer to Bottom Layer, tented both sides, 111 vias
v2: diameter 1.5, hole 0.9, Top Layer to Bottom Layer, 3 vias

## Nets (pads, with @x,y where several pads share a name; then routed paths per layer and width w, separated by ;. In a path a pad name is that pad's centre, name@x,y a point inside that pad or via, vN(x,y) a via of type N, cw(c..) or ccw(c..) an arc to the next point about the centre after c; other vN are vias at no path point)
5V: C9.2 D2.1 DIGITAL1.1 DIGITAL1.2 ICSP1.2 J1.1 J2.1 L1.2 P2.1 P2.2 P6.2 P7.2 P8.2 POWER1.4 R19.2 R24.2 R25.2 U1.3 | length 501
  Top Layer w0.254: DIGITAL1.1@70.358,11.43 DIGITAL1.2@70.358,13.97 70.358,14.605 72.39,16.637 72.39,22.225 77.724,27.559 77.724,49.333 87.093,58.703 ; ICSP1.2@90.678,41.783 87.093,45.368 87.093,58.703 ; R19.2@104.14,119.038 104.14,119.088 104.513,119.461 105.16,119.461 106.095,120.396 U1.3@106.57,120.396 108.712,120.396 110.561,118.547 114.117,118.547 120.303,112.361 120.303,103.285 126.052,97.536 140.208,97.536 ; P8.2@107.588,131.318 110.382,128.524 137.16,128.524 140.84,124.844 L1.2@140.84,117.348 ; D2.1@133.858,106.972 137.252,106.972 C9.2@137.414,106.81 140.84,106.81 146.428,106.81 P2.1@148.082,105.156 P2.2@148.082,110.236 ; 140.84,60.776 140.716,60.652 140.716,30.11 ; 140.84,72.136 138.554,69.85 POWER1.4@118.618,69.85 98.241,69.85 87.093,58.703 ; R25.2@143.51,27.266 143.51,27.316 140.716,30.11 ; R24.2@143.764,8.47 143.764,22.352 140.716,25.4 140.716,30.11
  Top Layer w2: P8.2@107.442,131.318 P8.2@107.588,131.318 ; J2.1@129.564,55.682 135.746,55.682 140.716,60.652 ; J1.1@129.564,74.986 137.724,74.986 140.84,78.102 ; 140.84,60.776 140.84,72.136 140.84,78.102 ; L1.2@140.84,117.348 140.84,106.81 140.84,97.536 140.84,78.102
  Bottom Layer w0.254: P6.2@52.07,131.318 54.61,133.858 82.296,133.858 ; P7.2@79.756,131.318 82.296,133.858 ; P8.2@107.442,131.318 109.982,133.858 ; P2.2@148.082,110.236 124.46,133.858 109.982,133.858 ; 82.296,133.858 109.982,133.858
5V_1: C5_1.2 C8_1.2 IC1_1.8 IC2_1.20 IC2_1.21 R3_1.1 R7_1.2 R8_1.2 R11_1.2 | length 96
  Top Layer w0.254: C8_1.2@1.27,35.14 2.583,35.14 IC1_1.8@2.667,35.224 2.667,33.147 3.302,32.512 v1(4.826,32.512) ; IC2_1.21@47.642,16.693 IC2_1.20@47.642,16.043 49.235,16.043 49.601,15.677 49.601,15.117 49.987,14.732 52.429,14.732 ; R11_1.2@52.429,15.599 R11_1.2@52.578,15.748 52.578,13.562 C5_1.2@52.678,13.462 54.715,13.462 54.864,13.611 54.864,18.288 ; R8_1.2@52.578,18.288 54.864,18.288 ; R7_1.2@52.578,19.558 54.864,19.558 ; R3_1.1@52.578,23.368 53.594,23.368 v1(54.356,22.606) 54.864,22.098 54.864,19.558 ; 54.864,18.288 54.864,19.558
  Bottom Layer w0.254: v1(4.826,32.512) 4.826,35.617 11.017,41.808 28.833,41.808 48.036,22.606 v1(54.356,22.606)
5V_2: C5_2.2 C8_2.2 IC1_2.8 IC2_2.20 IC2_2.21 R3_2.1 R7_2.2 R8_2.2 R11_2.2 | length 99.8
  Top Layer w0.254: C8_2.2@1.27,80.606 2.585,80.606 IC1_2.8@2.667,80.524 2.667,78.447 3.302,77.812 v1(4.826,77.812) ; IC2_2.21@47.642,61.993 IC2_2.20@47.642,61.343 49.235,61.343 49.601,60.977 49.601,60.417 49.987,60.032 52.429,60.032 ; R11_2.2@52.429,60.899 R11_2.2@52.578,61.048 52.578,58.862 C5_2.2@52.678,58.762 54.715,58.762 54.864,58.911 54.864,63.588 ; R8_2.2@52.578,63.588 54.864,63.588 ; R7_2.2@52.578,64.858 54.864,64.858 ; R3_2.1@52.578,68.668 53.594,68.668 v1(54.356,67.906) 54.864,67.398 54.864,64.858 ; 54.864,63.588 54.864,64.858
  Bottom Layer w0.254: v1(4.826,77.812) 4.826,83.908 8.294,87.376 28.956,87.376 42.418,73.914 42.418,70.954 45.466,67.906 v1(54.356,67.906)
5V_3: C5_3.2 C8_3.2 IC1_3.8 IC2_3.20 IC2_3.21 R3_3.1 R7_3.2 R8_3.2 R11_3.2 | length 96.4
  Top Layer w0.254: C8_3.2@1.27,126.326 2.583,126.326 IC1_3.8@2.667,126.41 2.667,124.333 3.302,123.698 v1(4.826,123.698) ; IC2_3.21@47.642,107.879 IC2_3.20@47.642,107.229 49.235,107.229 49.601,106.863 49.601,106.303 49.987,105.918 52.429,105.918 ; R11_3.2@52.429,106.785 R11_3.2@52.578,106.934 52.578,104.748 C5_3.2@52.678,104.648 54.715,104.648 54.864,104.797 54.864,109.474 ; R8_3.2@52.578,109.474 54.864,109.474 ; R7_3.2@52.578,110.744 54.864,110.744 ; R3_3.1@52.578,114.554 53.594,114.554 v1(54.356,113.792) 54.864,113.284 54.864,110.744 ; 54.864,109.474 54.864,110.744
  Bottom Layer w0.254: v1(4.826,123.698) 4.826,127.321 10.5,132.994 28.833,132.994 48.036,113.792 v1(54.356,113.792)
DIR1: IC2_1.19 PWM_H1.3 R13_1.1 | length 84.8
  Top Layer w0.254: IC2_1.19@47.642,15.393 48.869,15.393 49.022,15.24 v1(49.022,14.986) ; R13_1.1@48.006,9.994 48.094,9.906 v1(49.022,9.906) ; v1(67.31,25.908) 67.31,39.116 69.088,40.894 73.152,40.894 73.914,41.656 73.914,67.818 PWM_H1.3@70.358,71.374
  Bottom Layer w0.254: v1(49.022,14.986) v1(49.022,9.906) 51.308,9.906 v1(67.31,25.908)
DIR2: IC2_2.19 PWM_H1.2 R13_2.1 | length 34.8
  Top Layer w0.254: IC2_2.19@47.642,60.693 48.869,60.693 49.022,60.54 v1(49.022,60.286) ; R13_2.1@48.006,55.294 48.094,55.206 v1(49.022,55.206) ; v1(59.944,65.786) 62.738,68.58 v1(63.246,68.58)
  Bottom Layer w0.254: v1(49.022,60.286) v1(49.022,55.206) 59.536,65.72 59.878,65.72 v1(59.944,65.786) ; v1(63.246,68.58) 63.5,68.834 PWM_H1.2@70.358,68.834
DIR3: IC2_3.19 PWM_L1.7 R13_3.1 | length 59.7
  Top Layer w0.254: IC2_3.19@47.642,106.579 48.869,106.579 49.022,106.426 v1(49.022,106.172) ; R13_3.1@48.006,101.18 48.094,101.092 v1(49.022,101.092) ; v1(60.706,72.644) 62.23,71.12 v1(62.484,71.12)
  Bottom Layer w0.254: v1(49.022,106.172) v1(49.022,101.092) 60.706,89.408 v1(60.706,72.644) ; v1(62.484,71.12) 62.484,65.024 67.818,59.69 PWM_L1.7@70.358,59.69
En1_CHA: COMMS1.3 P6.3 | length 111.7
  Bottom Layer w0.254: P6.3@57.15,131.318 61.905,126.563 61.905,38.465 69.849,30.521 70.786,30.521 71.587,29.719 71.587,27.899 COMMS1.3@70.358,26.67
En1_CHB: COMMS1.4 P6.1 | length 111.8
  Bottom Layer w0.254: P6.1@46.99,131.318 47.498,130.81 47.498,121.469 61.468,107.499 61.468,38.1 COMMS1.4@70.358,29.21
En2_CHA: COMMS1.1 P7.3 | length 115.7
  Top Layer w0.254: COMMS1.1@70.358,21.59 75.438,26.67 75.438,121.92 P7.3@84.836,131.318
En2_CHB: COMMS1.2 P7.1 | length 109
  Top Layer w0.254: COMMS1.2@70.358,24.13 74.676,28.448 P7.1@74.676,131.318
En3_CHA: P8.3 PWM_L1.4 | length 96.7
  Bottom Layer w0.254: PWM_L1.4@70.358,52.07 112.522,94.234 P8.3@112.522,131.318
En3_CHB: P8.1 PWM_L1.3 | length 100.8
  Bottom Layer w0.254: PWM_L1.3@70.358,49.53 68.834,49.53 67.056,51.308 67.056,54.102 68.834,55.88 72.39,55.88 102.362,85.852 P8.1@102.362,131.318
GND: C2_1.2 C2_2.2 C2_3.2 C4_1.2 C4_2.2 C4_3.2 C5_1.1 C5_2.1 C5_3.1 C8.2 C8_1.1 C8_2.1 C8_3.1 C9.1 C12.1 D1.1 D1.2 DIGITAL1.35 DIGITAL1.36 IC1_1.5 IC1_2.5 IC1_3.5 IC2_1.17 IC2_1.18 IC2_1.29 IC2_2.17 IC2_2.18 IC2_2.29 IC2_3.17 IC2_3.18 IC2_3.29 ICSP1.6 J1.4 J2.4 P2.3 P2.4 P6.5 P7.5 P8.5 P9.2 P10.2 P11.2 P12.2 P13.2 P14.2 P15.3 P16.3 POWER1.2 POWER1.3 PWM_H1.7 R4_1.2 R4_2.2 R4_3.2 R5_1.2 R5_2.2 R5_3.2 R6_1.1 R6_2.1 R6_3.1 R13_1.2 R13_2.2 R13_3.2 R14_1.2 R14_2.2 R14_3.2 R16.1 R17.1 R18.1 R22.1 R23.2 U1.4 | length 543.3
  Top Layer w0.254: IC1_1.5@6.477,35.224 6.523,35.27 6.523,37.473 6.896,37.846 C2_1.2@6.946,37.846 v1(7.874,37.846) 7.874,55.096 1.643,61.327 1.643,78.533 C8_2.1@1.27,78.906 1.27,78.956 0.491,79.735 0.491,87.359 1.016,87.884 ; IC1_2.5@6.477,80.524 6.523,80.57 6.523,82.773 6.896,83.146 C2_2.2@6.946,83.146 v1(7.874,83.146) 7.874,84.582 7.112,85.344 3.556,85.344 1.016,87.884 ; IC1_3.5@6.477,126.41 6.523,126.456 6.523,128.659 6.896,129.032 C2_3.2@6.946,129.032 v1(7.874,129.032) ; v1(36.83,16.002) 36.83,16.645 37.203,17.018 C4_1.2@37.25,17.018 ; v1(36.83,61.302) 36.83,61.945 37.203,62.318 C4_2.2@37.25,62.318 ; v1(36.83,107.188) 36.83,107.831 37.203,108.204 C4_3.2@37.25,108.204 ; R14_1.2@37.426,23.368 R14_1.2@37.68,23.622 ; R14_2.2@37.426,68.668 R14_2.2@37.68,68.922 ; R14_3.2@37.426,114.554 37.68,114.808 38.354,114.808 41.91,118.364 41.91,128.778 34.036,136.652 5.334,136.652 0.491,131.809 0.491,125.455 1.016,124.93 1.016,87.884 ; IC2_1.29@44.704,17.018 IC2_1.29@44.958,17.272 ; IC2_2.29@44.704,62.318 IC2_2.29@44.958,62.572 ; IC2_3.29@44.704,108.204 IC2_3.29@44.958,108.458 ; R6_1.1@46.482,8.294 R13_1.2@48.006,8.294 ; R6_2.1@46.482,53.594 R13_2.2@48.006,53.594 ; R6_3.1@46.482,99.48 R13_3.2@48.006,99.48 ; IC2_1.18@47.642,14.743 IC2_1.17@47.642,14.093 47.65,14.085 50.255,14.085 50.778,13.562 C5_1.1@50.778,13.462 ; IC2_2.18@47.642,60.043 IC2_2.17@47.642,59.393 47.65,59.385 50.255,59.385 v1(50.778,58.862) C5_2.1@50.778,58.762 ; IC2_3.18@47.642,105.929 IC2_3.17@47.642,105.279 47.65,105.271 50.255,105.271 50.778,104.748 C5_3.1@50.778,104.648 ; C8.2@97.282,117.342 100.07,117.342 100.076,117.348 ; 100.07,117.348 100.076,117.348 ; R22.1@102.362,119.038 102.262,118.938 C12.1@100.584,118.938 100.584,117.856 100.076,117.348 ; R23.2@110.148,113.538 110.148,117.182 108.204,119.126 U1.4@106.57,119.126 106.095,119.126 104.317,117.348 100.076,117.348 ; DIGITAL1.35@113.538,11.43 DIGITAL1.36@113.538,13.97 ; D1.1@124.7,101.183 D1.2@129.3,101.183 129.51,101.393 133.485,101.393 R18.1@133.858,101.766 136.564,101.766 137.414,102.616 C9.1@137.414,104.01 ; P12.2@147.32,61.468 151.13,65.278 ; P11.2@147.32,71.628 151.13,75.438 ; P10.2@147.32,81.788 151.13,85.598 ; P9.2@147.32,91.948 147.574,91.948 151.13,95.504 ; P14.2@147.362,41.157 151.13,44.925 ; P13.2@147.362,51.317 151.13,55.085 ; P15.3@147.574,33.782 151.13,37.338 151.13,44.925 ; P2.4@148.082,120.396 P2.3@148.082,115.316 151.13,112.268 151.13,95.504 ; 151.13,44.925 151.13,55.085 ; 151.13,55.085 151.13,65.278 ; 151.13,65.278 151.13,75.438 ; 151.13,75.438 151.13,85.598 ; 151.13,85.598 151.13,95.504
  Bottom Layer w0.254: v1(7.874,37.846) 11.43,41.402 21.844,41.402 26.416,36.83 26.416,34.29 v1(37.338,23.368) ; v1(7.874,83.146) 11.342,86.614 21.336,86.614 26.162,81.788 26.162,78.994 36.488,68.668 v1(37.338,68.668) ; v1(36.83,107.188) 27.686,107.188 26.162,108.712 9.398,108.712 5.025,113.085 4.56,113.085 0.762,116.883 0.762,121.158 2.032,122.428 6.858,122.428 7.874,123.444 v1(7.874,129.032) 7.874,129.794 10.668,132.588 23.114,132.588 25.654,130.048 25.654,126.238 v1(37.338,114.554)
  other v1: 50.778,13.512 50.778,104.698
NetC2_1_1: C2_1.1 IC1_1.6 | length 2.6
  Top Layer w0.254: IC1_1.6@5.207,35.224 5.207,37.807 C2_1.1@5.246,37.846
NetC2_2_1: C2_2.1 IC1_2.6 | length 2.6
  Top Layer w0.254: IC1_2.6@5.207,80.524 5.207,83.107 C2_2.1@5.246,83.146
NetC2_3_1: C2_3.1 IC1_3.6 | length 2.6
  Top Layer w0.254: IC1_3.6@5.207,126.41 5.207,128.993 C2_3.1@5.246,129.032
NetC3_1_1: C3_1.1 IC2_1.6 | length 5.6
  Top Layer w0.254: C3_1.1@37.25,19.304 37.25,18.376 37.633,17.993 IC2_1.6@41.766,17.993
NetC3_1_2: C3_1.2 IC2_1.4 P1_1.1 Q1_1.3 Q2_1.2 | length 48.3
  Top Layer w0.254: Q2_1.2@12.7,24.384 Q2_1.2@15.24,26.924 ; v1(38.862,20.32) 38.862,19.392 C3_1.2@38.95,19.304 39.021,19.375 41.684,19.375 IC2_1.4@41.766,19.293
  Top Layer w2: P1_1.1@4.826,18.034 12.446,18.034 12.7,17.78 12.7,19.558 Q2_1.2@12.7,24.384
  Bottom Layer w0.254: v1(13.208,19.558) 13.471,19.295 26.661,19.295 27.686,20.32 v1(38.862,20.32)
NetC3_2_1: C3_2.1 IC2_2.6 | length 5.6
  Top Layer w0.254: C3_2.1@37.25,64.604 37.25,63.676 37.633,63.293 IC2_2.6@41.766,63.293
NetC3_2_2: C3_2.2 IC2_2.4 P1_2.1 Q1_2.3 Q2_2.2 | length 48.3
  Top Layer w0.254: Q2_2.2@12.7,69.684 Q2_2.2@15.24,72.224 ; v1(38.862,65.62) 38.862,64.692 C3_2.2@38.95,64.604 39.021,64.675 41.684,64.675 IC2_2.4@41.766,64.593
  Top Layer w2: P1_2.1@4.826,63.334 12.446,63.334 12.7,63.08 12.7,64.858 Q2_2.2@12.7,69.684
  Bottom Layer w0.254: v1(13.208,64.858) 13.471,64.595 26.661,64.595 27.686,65.62 v1(38.862,65.62)
NetC3_3_1: C3_3.1 IC2_3.6 | length 5.6
  Top Layer w0.254: C3_3.1@37.25,110.49 37.25,109.562 37.633,109.179 IC2_3.6@41.766,109.179